# Altium PCB 存储物柜V1.1.PcbDoc (part 1 of 2)
Units mm, origin at the board's own origin, x right, y up, seen from the top; angles counter-clockwise.
Board outline 525.53 x 267.33 mm, 2 copper layers (Top Layer, Bottom Layer); 194 components, 171 nets, 781 pads, 690 vias.
Unrouted connection lines stored in the file: 2.
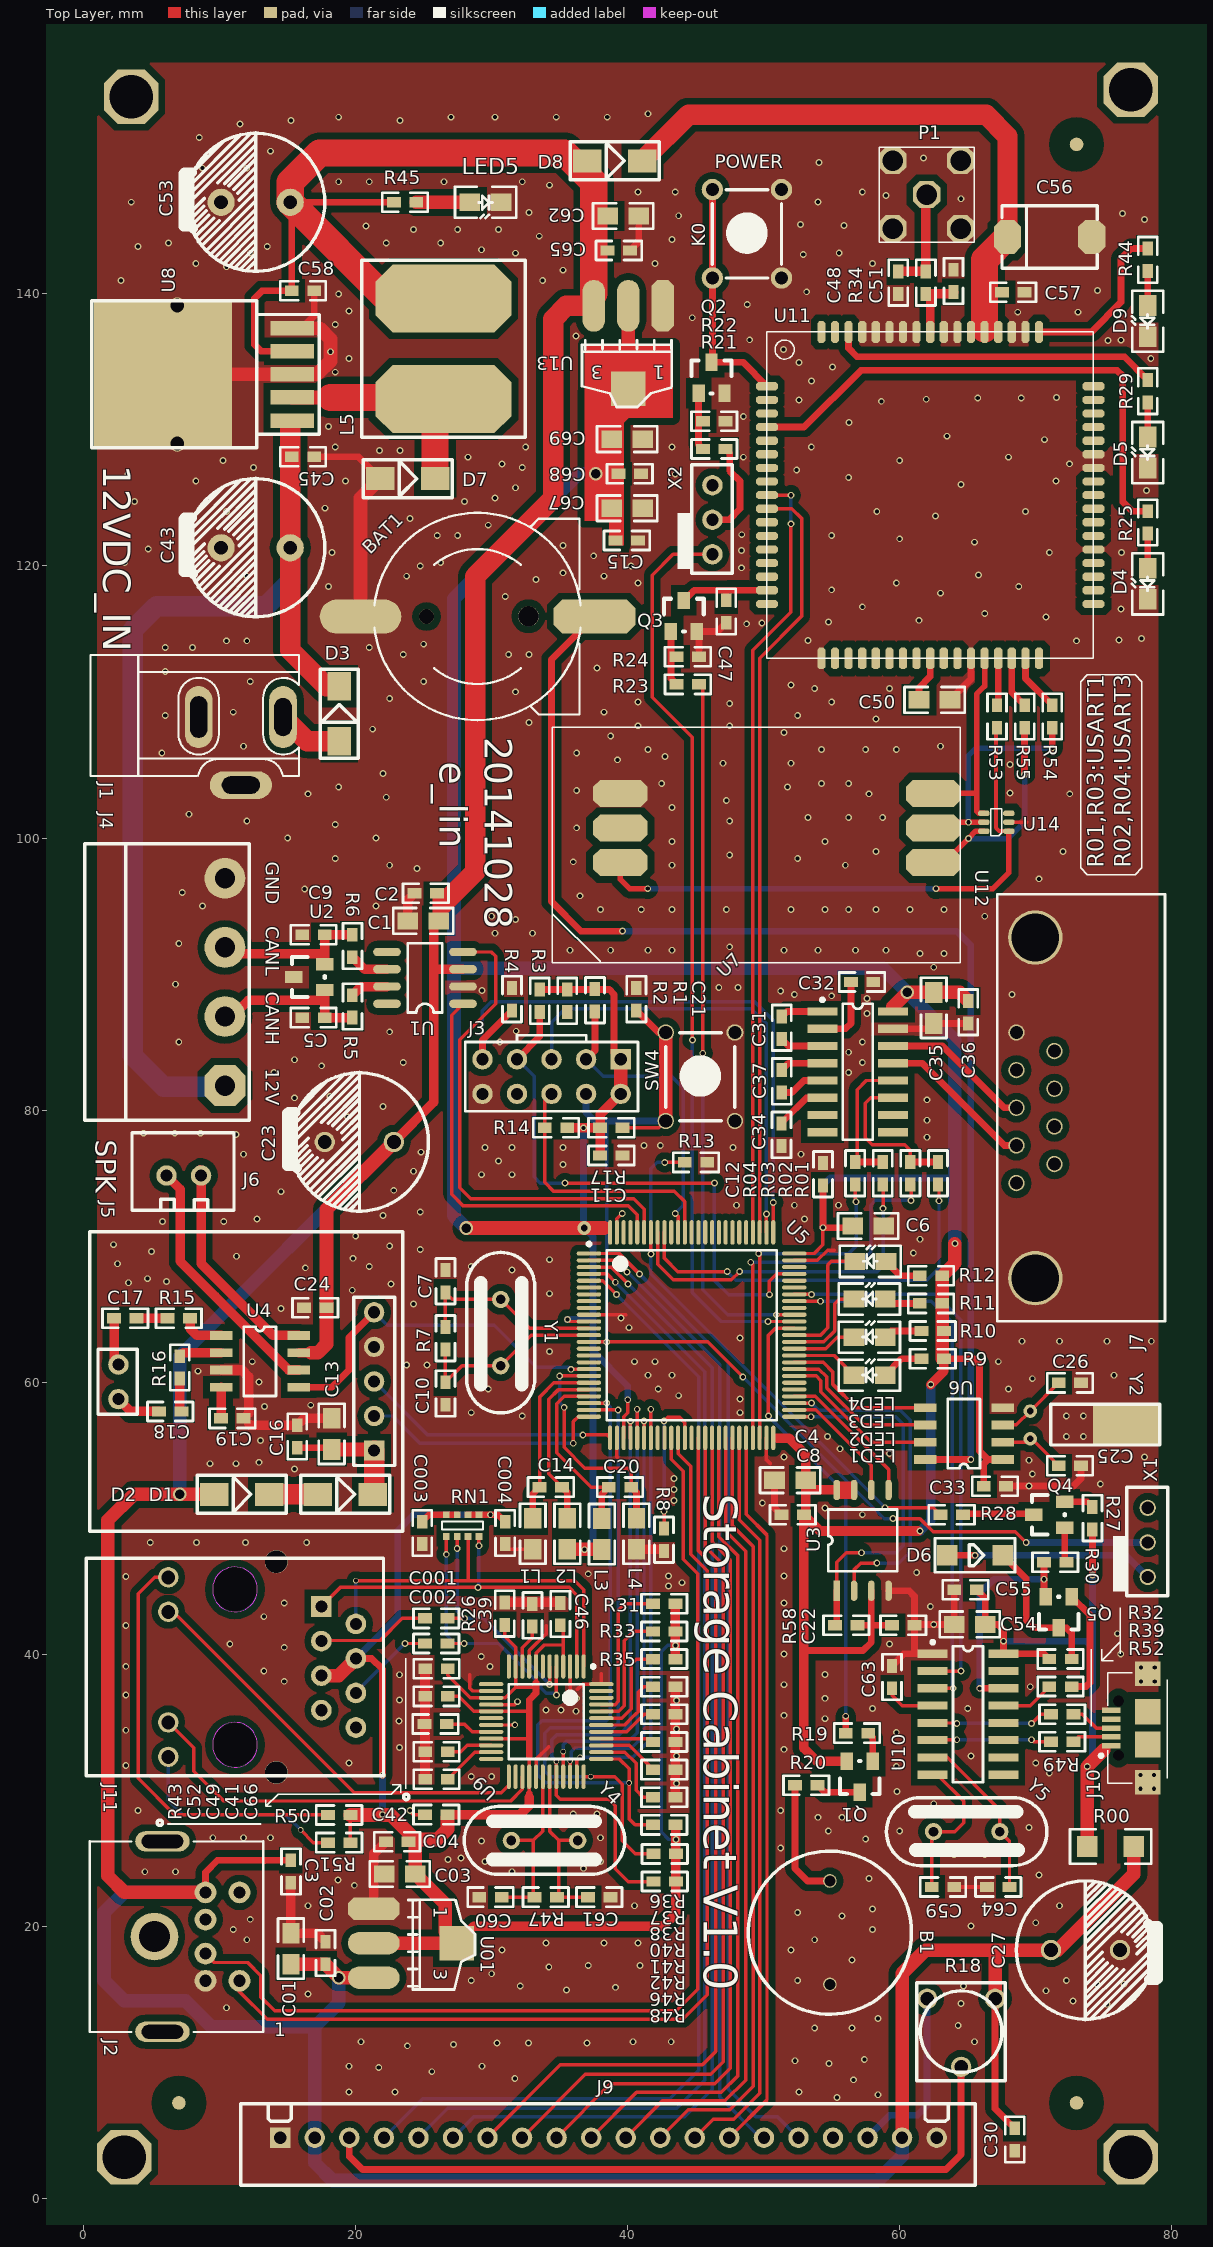
[diagram p0: Top Layer view]
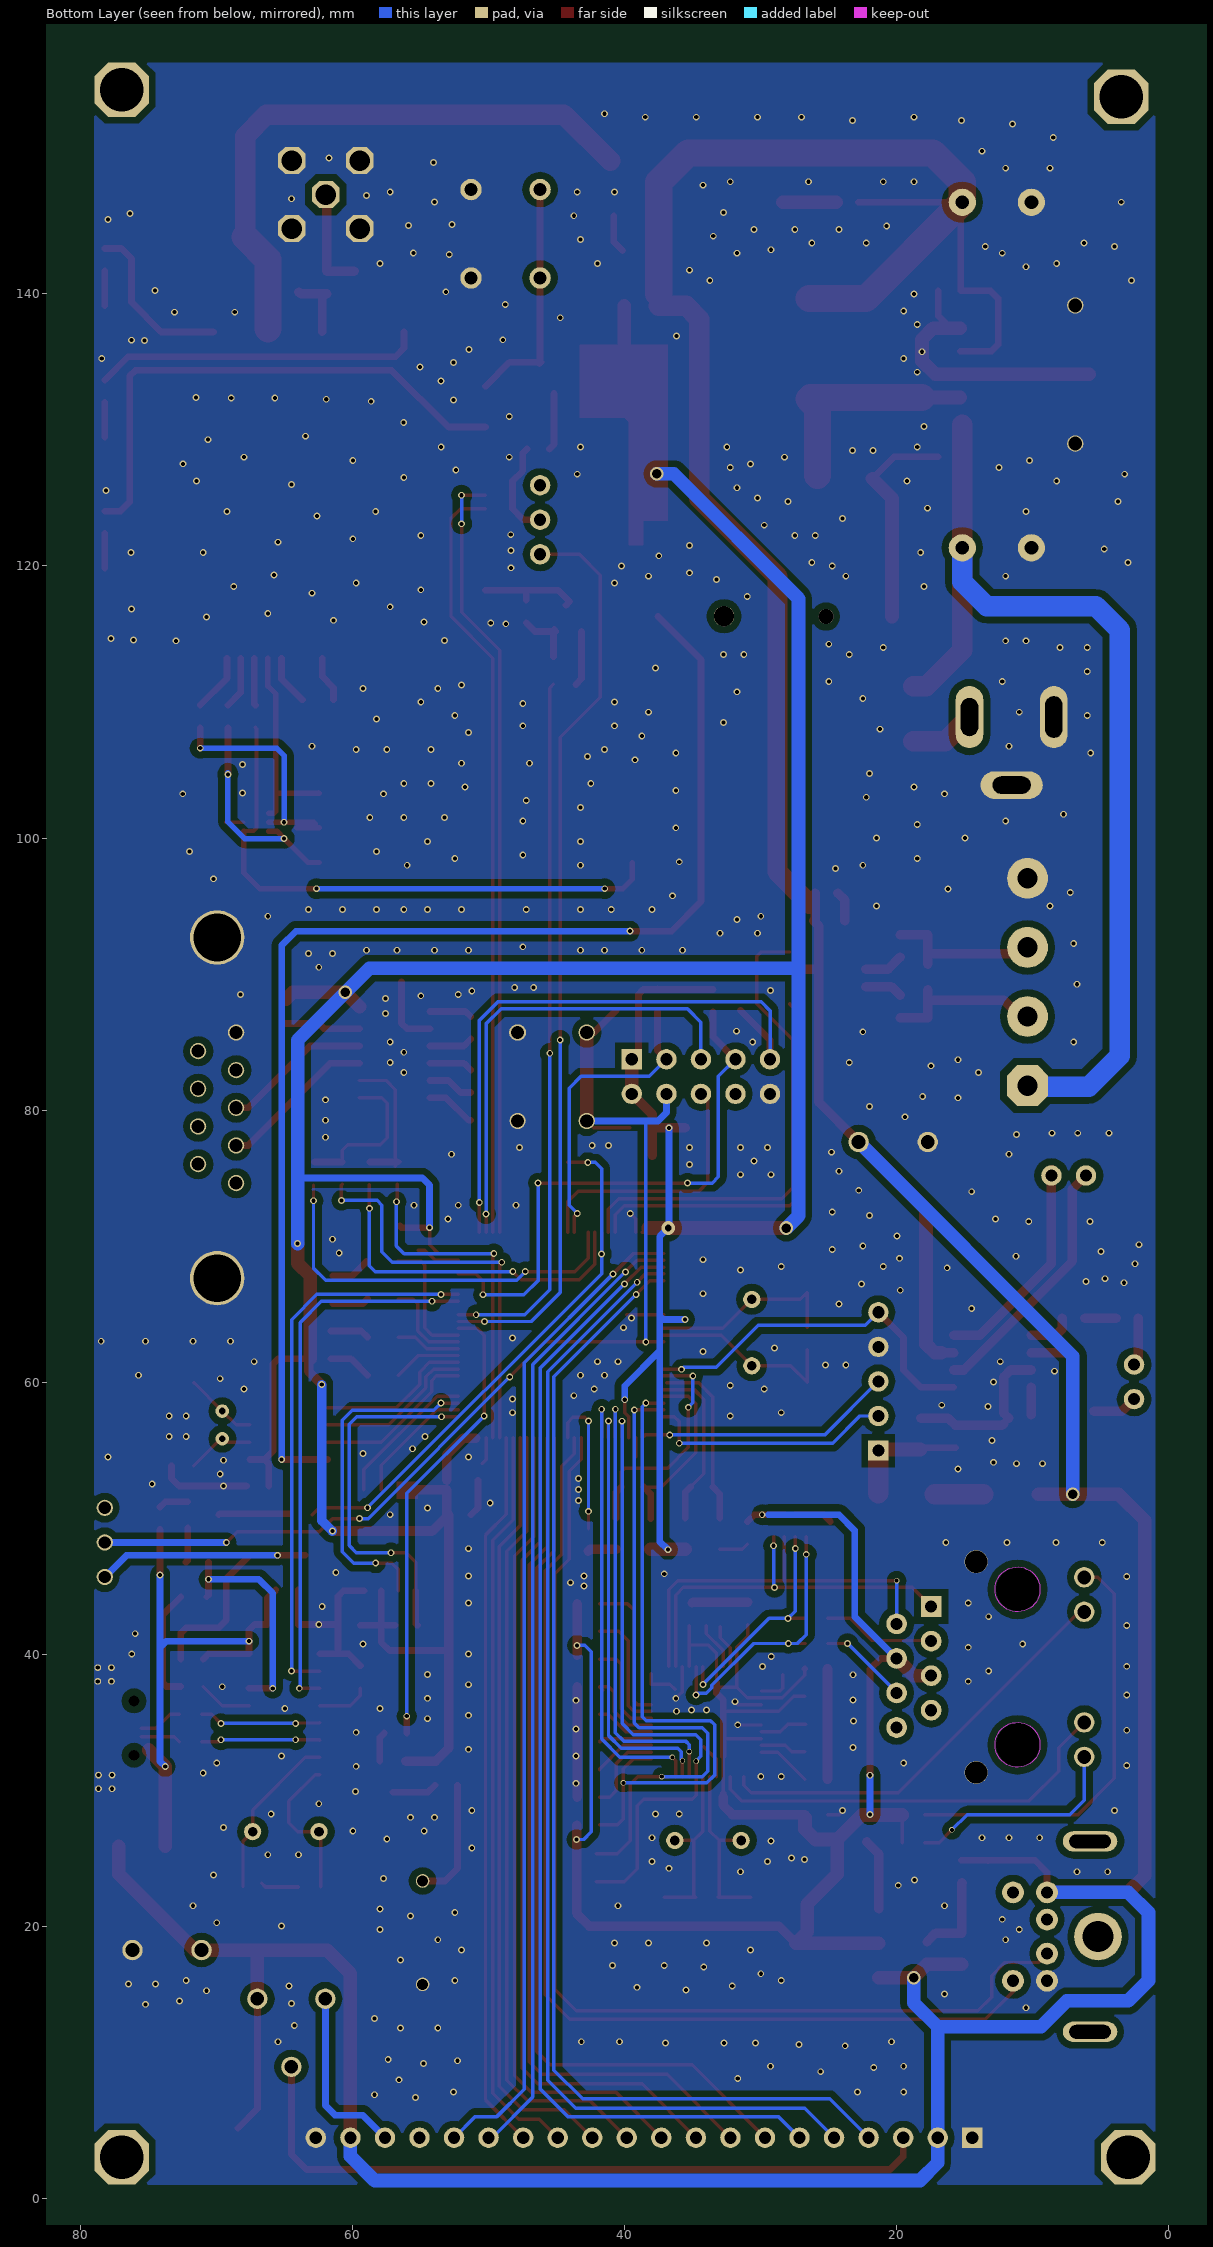
[diagram p1: Bottom Layer view, seen from below]

## Layer stack, top to bottom
Top Layer: signal copper 0.0356
Dielectric: dielectric 0.32, FR-4, Dk 4.8
Bottom Layer: signal copper 0.0356

## Board outline
-30.994,-50.111 487.166,-50.111 487.674,-49.603 494.532,-42.745 494.532,83.874 494.532,195.38 472.688,217.224 30.855,217.224 -10.293,217.224 -29.47,198.047

## Design rules (kind name [scope] priority, off if disabled: settings)
Clearance [All] p1: gap=0.5
PlaneClearance [All] p1: clearance=0.5
PlaneConnect [All] p1: planeconnectstyle=Direct reliefexpansion=0.508 reliefentries=4 reliefconductorwidth=0.254 reliefairgap=0.254
PolygonConnect [All] p1: connectstyle=Direct reliefconductorwidth=0.254 reliefentries=4 polygonreliefangle="90 Angle"
RoutingVias [All] p1: holewidth=0.711 width=1.27 viastyle="Through Hole" minholewidth=0.3 minwidth=1.27 maxholewidth=0.711 maxwidth=1.27
SilkscreenOverComponentPads [All] p1: minsilkscreentomaskgap=0.254
SolderMaskExpansion [All] p1: expansion=0.102
Width [All] p1: maxlimit=6 minlimit=0.254 preferedwidth=0.254 minimp=50.000000 maximp=50.000000 favimp=50.000000
25 further rules are at their usual default settings.

## Components (designator, comment, footprint, x,y, rotation, side; value= is the part's Value field where it differs from the comment)
B1 "BEEP" BEEP-12 54.864,23.32 r270 top locked
BAT1 "BATT" BATM 28.956,116.284 r90 top locked
C1 "10uF/16V" 0805 23.826,93.907 r0 top locked
C01 "10uF" 0805 15.24,17.199 r90 top locked
C001 "6.8nF" 0603 25.1,42.624 r0 top
C2 "0.1uF" 0603 24.334,95.939 r0 top locked
C02 "0.1uF" 0603 17.78,17.199 r90 top locked
C002 "6.8nF" 0603 25.1,40.78 r0 top
C3 "0.1uF" 0603 15.24,24.844 r270 top locked
C03 "10uF" 0805 24.384,23.828 r180 top locked
C003 "10nF" 0603 24.892,49.736 r270 top
C4 "10uF/25V" 0805 50.8,52.784 r0 top locked
C04 "0.1uF" 0603 23.876,26.2 r180 top locked
C004 "10nF" 0603 30.988,49.736 r270 top
C5 "470pF" 0603 17.73,86.795 r180 top locked
C6 "10uF/25V" 0805 58.826,71.478 r180 top locked
C7 "18p" 0603 26.601,66.586 r90 top locked
C8 "0.1uF" 0603 51.308,50.244 r0 top locked
C9 "470pF" 0603 17.73,92.891 r180 top locked
C10 "18p" 0603 26.601,59.982 r270 top locked
C11 "0.1uF" 0603 39.624,76.66 r180 top locked
C12 "0.1uF" 0603 54.356,76.101 r270 top locked
C13 "10uF/16V" 0805 18.238,57.331 r270 top locked
C14 "0.1uF" 0603 33.528,52.276 r0 top locked
C15 "0.1uF" 0603 39.116,121.872 r0 top locked
C16 "0.1uF" 0603 15.698,56.823 r270 top locked
C17 "1uF" 0603 2.236,64.697 r0 top locked
C18 "1uF" 0603 5.538,57.839 r0 top locked
C19 "1uF" 0603 10.11,57.331 r0 top locked
C20 "0.1uF" 0603 38.608,52.276 r0 top locked
C21 "0.1uF" 0603 40.64,87.328 r90 top locked
C22 "0.1uF" 0603 59.436,42.116 r0 top locked
C23 "470uF" RB5.0-8#1 22.81,77.651 r0 top locked
C24 "0.1uF" 0603 16.206,65.459 r0 top locked
C25 "20pF" 0603 73.34,53.844 r180 top locked
C26 "20pF" 0603 73.34,59.94 r180 top locked
C27 "470uF" RB5.0-8#1 71.12,18.24 r180 top locked
C30 "0.1uF" 0603 68.456,3.488 r90 top
C31 "0.1uF" 0603 51.329,86.871 r270 top locked
C32 "0.1uF" 0603 56.409,89.411 r0 top locked
C33 "0.1uF" 0603 67.824,52.348 r180 top locked
C34 "0.1uF" 0603 51.308,79 r270 top locked
C35 "10uF" 0805 62.505,86.363 r90 top locked
C36 "0.1uF" 0603 65.045,86.363 r90 top locked
C37 "0.1uF" 0603 51.329,81.283 r90 top locked
C39 "0.1uF" 0603 30.963,42.149 r90 top locked
C41 "0.1uF" 0603 26.772,36.891 r180 top locked
C42 "0.1uF" 0603 26.75,28.2 r180 top locked
C43 "470uF" RB5.0-8#2 15.19,121.339 r0 top locked
C45 "0.1uF" 0603 16.954,128.039 r180 top locked
C46 "0.1uF" 0603 35.052,42.116 r90 top locked
C47 "0.1uF" 0603 47.244,115.824 r90 top
C48 "NC" 0603 59.894,141.659 r270 top locked
C49 "4.7uF" 0603 25.05,34.859 r0 top locked
C50 "10uF" 0805 61.418,110.163 r0 top locked
C51 "NC" 0603 63.958,140.135 r90 top locked
C52 "10nF" 0603 26.772,32.827 r180 top locked
C53 "470uF" RB5.0-8#2 15.19,146.739 r0 top locked
C54 "10uF" 0805 64.008,42.184 r0 top locked
C55 "0.1uF" 0603 64.008,44.724 r0 top locked
C56 "1000uF/6.3V" 7343 68.022,144.199 r0 top locked
C57 "0.1uF" 0603 67.514,140.135 r0 top locked
C58 "0.1uF" 0603 16.954,140.231 r180 top locked
C59 "18pF" 0603 64.008,22.88 r180 top locked
C60 "18p" 0603 29.084,22.133 r0 top locked
C61 "18p" 0603 38.736,22.133 r180 top locked
C62 "10uF" 0805 38.526,145.731 r0 top locked
C63 "0.1uF" 0603 59.436,39.136 r270 top locked
C64 "18pF" 0603 68.072,22.88 r180 top locked
C65 "0.1uF" 0603 38.526,143.191 r0 top locked
C66 "0.1uF" 0603 26.772,38.923 r180 top
C67 "10uF" 0805 38.822,124.247 r0 top locked
C68 "0.1uF" 0603 39.33,126.787 r0 top locked
C69 "10uF" 0805 38.822,129.327 r0 top locked
D1 "M7" SMB 17.222,51.743 r0 top locked
D2 "M7" SMB 9.602,51.743 r0 top locked
D3 "B340" SMB 18.796,107.115 r90 top locked
D4 "LED-R" LED-0805 78.232,119.84 r270 top
D5 "LED-R" LED-0805 78.232,129.492 r270 top
D6 "IN4148" SOD-23 62.484,47.264 r0 top
D7 "B340" SMB 21.794,126.419 r0 top locked
D8 "B340" SMB 37.034,149.787 r0 top locked
D9 "LED-R" LED-0805 78.232,139.144 r270 top
J1 "POWER" DC10B 4.014,104.575 r0 top locked
J2 "PS2" PS2-6PIN 0.458,19.231 r90 top locked
J3 "JTAG_10" JTAG_10 39.484,83.728 r180 top locked
J4 "SIP4A-2.50(带槽)" 5.08_4P 12.192,79.248 r90 top
J5 "2.54-7" SYN6288 0.458,71.047 r270 top locked
J6 "SIP2A-2.50（带槽）" 2.54 3.556,72.644 r0 top
J7 "DB9" DB9/M 68.58,74.628 r90 top locked
J9 "12864" XH2.54-20P 11.56,0.948 r0 top
J10 "microb usb" USB_micro 78.232,34.564 r90 top locked
J11 "HR911105A" HR911105A 11.126,39.043 r90 top locked
K0 "KEY_M" KEY_M#1 46.228,141.176 r90 top
L1 "100uH" 0805 33.02,47.704 r90 top locked
L2 "100uH" 0805 35.56,47.704 r90 top locked
L3 "100uH" 0805 38.1,49.97 r270 top locked
L4 "100uH" 0805 40.64,47.704 r90 top locked
L5 "33uH" INDUCTOR-1212 32.462,129.467 r90 top locked
LED1 "" LED-0805 58.928,60.5 r180 top locked
LED2 "" LED-0805 58.928,63.3 r180 top locked
LED3 "" LED-0805 58.928,66.1 r180 top locked
LED4 "" LED-0805 58.985,68.872 r180 top locked
LED5 "LED-R" LED-0805 28.398,146.739 r0 top locked
P1 "COAX-M" ST-TH1 65.482,150.803 r180 top locked
Q1 "3906" SOT-23 58.015,32.131 r180 top locked
Q2 "3904" SOT-23 45.212,132.692 r0 top
Q3 "3904" SOT-23 43.18,115.184 r0 top
Q4 "3906" SOT-23 72.136,49.296 r90 top locked
Q5 "3904" SOT-23 72.644,44.216 r180 top locked
R00 "NC" 1206 77.216,25.86 r180 top
R1 "10K" 0603 37.592,88.903 r270 top locked
R01 "0" 0603 62.816,76.183 r270 top locked
R2 "10K" 0603 35.56,88.852 r270 top locked
R02 "0" 0603 60.784,76.183 r270 top locked
R3 "10K" 0603 33.528,88.852 r270 top locked
R03 "0" 0603 58.752,76.183 r270 top locked
R4 "10K" 0603 31.496,87.328 r90 top locked
R04 "0" 0603 56.72,76.183 r270 top locked
R5 "10" 0603 19.762,86.795 r90 top locked
R6 "10" 0603 19.762,92.891 r270 top locked
R7 "1M" 0603 26.601,64.046 r270 top locked
R8 "10K" 0603 42.672,49.228 r270 top locked
R9 "1K" 0603 61.604,61.718 r0 top locked
R10 "1K" 0603 61.604,63.75 r0 top locked
R11 "1K" 0603 63.128,65.782 r180 top locked
R12 "1K" 0603 63.128,67.814 r180 top locked
R13 "10K" 0603 44.196,76.152 r0 top locked
R14 "10K" 0603 35.56,78.692 r180 top locked
R15 "1K" 0603 7.824,64.697 r180 top locked
R16 "1K" 0603 7.062,61.903 r270 top locked
R17 "10K" 0603 39.624,78.692 r180 top locked
R18 "10K" RM065-V1 64.516,9.652 r90 top
R19 "1K" 0603 57.683,34.191 r180 top locked
R20 "22" 0603 52.299,30.356 r0 top locked
R21 "1K" 0603 47.194,128.603 r180 top locked
R22 "10K" 0603 47.194,130.635 r180 top locked
R23 "1K" 0603 45.25,111.295 r180 top locked
R24 "10K" 0603 45.25,113.327 r180 top locked
R25 "1K" 0603 78.232,122.38 r90 top
R26 "12.4K" 0603 32.995,43.673 r270 top locked
R27 "22" 0603 74.168,50.82 r270 top locked
R28 "1K" 0603 62.992,50.244 r0 top locked
R29 "1K" 0603 78.232,132.032 r90 top
R30 "1K" 0603 70.612,46.756 r0 top locked
R31 "10K" 0603 43.511,43.698 r180 top locked
R32 "2K" 0603 72.644,39.644 r180 top locked
R33 "10K" 0603 43.511,41.666 r180 top locked
R34 "0R" 0603 61.926,141.659 r270 top locked
R35 "10K" 0603 43.511,39.634 r180 top locked
R36 "10K" 0603 43.511,37.602 r180 top locked
R37 "10K" 0603 43.511,35.57 r180 top locked
R38 "10K" 0603 43.511,33.538 r180 top locked
R39 "1K" 0603 72.644,37.612 r180 top locked
R40 "10K" 0603 43.511,31.506 r180 top locked
R41 "10K" 0603 43.511,29.474 r180 top locked
R42 "10K" 0603 43.511,27.442 r180 top locked
R43 "10K" 0603 26.772,30.795 r180 top locked
R44 "1K" 0603 78.232,141.684 r90 top
R45 "1K" 0603 22.81,146.739 r0 top locked
R46 "10K" 0603 43.55,25.308 r180 top locked
R47 "1M" 0603 33.148,22.133 r0 top locked
R48 "10K" 0603 43.55,23.276 r180 top locked
R49 "0" 0603 71.12,33.548 r0 top locked
R50 "270" 0603 19.61,28.172 r180 top locked
R51 "270" 0603 19.61,26.14 r180 top locked
R52 "0" 0603 71.12,35.58 r0 top locked
R53 "22" 0603 67.154,108.111 r90 top locked
R54 "22" 0603 71.218,108.111 r90 top locked
R55 "22" 0603 69.186,108.111 r90 top locked
R58 "10K" 0603 56.896,42.116 r180 top locked
RN1 "51R" 0603-4 29.464,50.244 r180 top
SW4 "KEY_M" KEY_M#2 42.8,79.2 r90 top locked
U1 "TAJ1050" SO-8 27.89,87.811 r180 top locked
U01 "LM1117" AMS1117 21.336,21.288 r270 top locked
U2 "TVS_CAN" SOT-23 17.73,88.827 r90 top locked
U3 "SST25VF016B" SOIC-8 55.372,44.656 r90 top locked
U4 "SNAP01" sop-8 10.11,63.427 r0 top locked
U5 "STM32F103VET6" LQFP100_N 44.704,63.452 r0 top locked
U6 "DS1302" SOP-8 67.564,54.308 r180 top locked
U7 "MAX3232" SOP16#1 54.317,87.252 r0 top
U8 "LM2596S_5.0" TO-263-5 15.338,130.691 r0 top locked
U9 "W5500" LQFP48_N 34.011,35.037 r270 top locked
U10 "CH340" SOP16#2 65.024,35.58 r270 top
U11 "SIM900" SIM-900 50.242,113.211 r0 top locked
U12 "SIM" sim-6p 64.466,108.131 r180 top locked
U13 "LM1117" AMS1117 42.59,139.127 r180 top locked
U14 "SMF05" SC70-6L 68.022,100.511 r180 top locked
X1 "2.54-TX" 2.54-TX#1 76.708,52.276 r270 top
X2 "2.54-TX" 2.54-TX#2 44.704,127.46 r270 top
Y1 "8MHz" XTAL_US 30.665,66.078 r270 top locked
Y2 "32.768KHz" cs-308 71.12,58.372 r0 top locked
Y4 "25MHz" XTAL_US 31.446,26.299 r0 top locked
Y5 "12M" XTAL_US 62.484,26.944 r0 top locked

## Footprints (in the part's own frame and the unit in brackets; to place one, negate y for a bottom-side part, rotate by r counter-clockwise, add the part's x,y. Pads: shape width x height; smd on the part's side, far side on the other; paste and mask are expansions set on the pad)
2.54 [mm]
  round 1.5 hole 0.9: 1(5.08,2.54) 2(2.54,2.54)
  silkscreen extent 0,0 7.5,5.7
2.54-TX#1 [mm]
  round 1.2 hole 0.9: 1(6.604,1.524) 2(4.064,1.524) 3(1.524,1.524)
  silkscreen extent 0,0 8,3
2.54-TX#2 [mm]
  round 1.5 hole 0.9: 1(6.604,1.524) 2(4.064,1.524) 3(1.524,1.524)
  silkscreen extent 0,0 8,3
5.08_4P [mm]
  oct 3x3 hole 1.5: 1(2.55,1.8)
  round 3 hole 1.5: 2(7.63,1.8) 3(12.71,1.8) 4(17.79,1.8)
  silkscreen extent 0,0 20.32,12.11
0603 [mil]
  rect 40x30 smd: 1(0,0) 2(65,0)
  silkscreen extent -33,-28 98,28
0603-4 [mm]
  rect 0.5x0.5 smd: 1(0.4,0) 2(0.4,1.6) 3(1.2,0) 4(1.2,1.6) 5(2,0) 6(2,1.6) 7(2.8,0) 8(2.8,1.6)
  silkscreen extent 0.1,0.5 3.1,1.1
0805 [mil]
  rect 60x50 smd: 1(0,0) 2(90,0)
  silkscreen extent -42,-37 132,37
1206 [mil]
  rect 60x60 smd: 1(0,0) 2(135,0)
  silkscreen extent -50,-50 185,50
7343 [mm]
  oct 2x2.5 smd: 1(-0.1,0) 2(6.1,0)
  silkscreen extent -0.5,-2.3 6.5,2.3
AMS1117 [mil]
  oct 65x150 smd: 1(0.03,-0.06)
  oval 65x150 smd: 2(100.03,-0.06) 3(200.03,-0.06)
  rect 100x100 smd: 4(100.03,239.94)
  silkscreen extent -26,100 234,293
BATM [mm]
  round 1.1 hole 1.1 unplated: 0(0,3.748)
  round 1.5 hole 1.5 unplated: 0(0.025,-3.752)
  oct 2.5x6 smd: 1(0,-8.602)
  oval 2.5x6 smd: 2(0,8.598)
  silkscreen extent -7.62,-7.58 7.62,7.57
BEEP-12 [mm]
  round 1 hole 0.8: 1(0,0) 2(7.6,0)
  silkscreen extent -2.2,-6 9.8,6
cs-308 [mm]
  round 1 hole 0.5: 1(-1.524,-0.508) 2(-1.524,-2.54)
  rect 5x3 smd: 3(5.588,-1.524)
  silkscreen extent 0,-3 8,0
DB9/M [mil]
  round 47.24 hole 38: 1(0,0) 2(109,0) 3(218,0) 4(327,0) 5(436,0) 6(55,-110) 7(164,-110) 8(273,-110) 9(382,-110)
  round 157.48 hole 138: 10(711,-55) 11(-275,-55)
  silkscreen extent -400,-430 836,55
DC10B [mil]
  oval 80x180 hole 50 slot 110 at 90 deg: 1(419.1,170)
  oval 80x180 hole 50 slot 120 at 90 deg: 2(175,170)
  oval 180x80 hole 50 slot 110 at 0 deg: 3(297.05,-26.85)
  silkscreen extent -138,0 465,350
HR911105A [mil]
  rect 60x60 hole 35: 1(175.2,-250)
  round 60 hole 35: 2(125.2,-350) 3(75.2,-250) 4(25.2,-350) 5(-24.8,-250) 6(-74.8,-350) 7(-124.8,-250) 8(-174.8,-350)
  round 59.06 hole 40.16: 9(259.84,192.91) 12(-259.84,192.91)
  round 59.05 hole 40.16: 10(160,192.91) 11(-160,192.91)
  round 66.93 hole 64.96: 13(305.12,-120) 14(-305.12,-120)
  Keep-Out Layer circle w2: c225.04,0 r64.96
  Keep-Out Layer circle w2: c-224.96,0 r64.96
  silkscreen extent -315,-430 315,430
INDUCTOR-1212 [mm]
  oct 5x10 smd: 1(2.8,6) 2(10.2,6)
  silkscreen extent 0,0 13,12
JTAG_10 [mm]
  rect 1.5x1.5 hole 0.9: 1(0,0)
  round 1.5 hole 0.9: 2(0,2.54) 3(2.54,0) 4(2.54,2.54) 5(5.08,0) 6(5.08,2.54) 7(7.62,0) 8(7.62,2.54) 9(10.16,0) 10(10.16,2.54)
  silkscreen extent -1.27,-1.78 11.43,3.81
KEY_M#1 [mil]
  round 62 hole 38: 1(0,0) 1(255.91,0) 2(0,-200) 2(255.91,-200)
  silkscreen extent 0,-200 255,0
KEY_M#2 [mil]
  round 47.24 hole 38: 1(0,0) 1(255.91,0) 2(0,-200)
  oval 47.24x49.21 hole 38: 2(255.91,-200)
  silkscreen extent 0,-200 255,0
LED-0805 [mil]
  rect 60x50 smd: 1(0,0) 2(90,0)
  silkscreen extent -43,-46 134,45
LQFP48_N [mm] "Thin QFP, 48-Leads, Body 7x7mm, Pitch 0.5mm, IPC Medium Density"
  oval 1.8x0.3 smd: 1(-4.05,2.75) 2(-4.05,2.25) 3(-4.05,1.75) 4(-4.05,1.25) 5(-4.05,0.75) 6(-4.05,0.25) 7(-4.05,-0.25) 8(-4.05,-0.75) 9(-4.05,-1.25) 10(-4.05,-1.75) 11(-4.05,-2.25) 12(-4.05,-2.75) 25(4.05,-2.75) 26(4.05,-2.25) 27(4.05,-1.75) 28(4.05,-1.25) 29(4.05,-0.75) 30(4.05,-0.25) 31(4.05,0.25) 32(4.05,0.75) 33(4.05,1.25) 34(4.05,1.75) 35(4.05,2.25) 36(4.05,2.75)
  oval 0.3x1.8 smd: 13(-2.75,-4.05) 14(-2.25,-4.05) 15(-1.75,-4.05) 16(-1.25,-4.05) 17(-0.75,-4.05) 18(-0.25,-4.05) 19(0.25,-4.05) 20(0.75,-4.05) 21(1.25,-4.05) 22(1.75,-4.05) 23(2.25,-4.05) 24(2.75,-4.05) 37(2.75,4.05) 38(2.25,4.05) 39(1.75,4.05) 40(1.25,4.05) 41(0.75,4.05) 42(0.25,4.05) 43(-0.25,4.05) 44(-0.75,4.05) 45(-1.25,4.05) 46(-1.75,4.05) 47(-2.25,4.05) 48(-2.75,4.05)
  silkscreen extent -4.17,-2.75 2.75,3.58, body extent -3.5,-3.5 3.5,3.5, height 1.6
LQFP100_N [mm] "Thin QFP, 100-Leads, Body 14x14mm, Pitch 0.5mm, IPC Medium Density"
  oval 1.8x0.3 smd: 1(-7.55,6) 2(-7.55,5.5) 3(-7.55,5) 4(-7.55,4.5) 5(-7.55,4) 6(-7.55,3.5) 7(-7.55,3) 8(-7.55,2.5) 9(-7.55,2) 10(-7.55,1.5) 11(-7.55,1) 12(-7.55,0.5) 13(-7.55,0) 14(-7.55,-0.5) 15(-7.55,-1) 16(-7.55,-1.5) 17(-7.55,-2) 18(-7.55,-2.5) 19(-7.55,-3) 20(-7.55,-3.5) 21(-7.55,-4) 22(-7.55,-4.5) 23(-7.55,-5) 24(-7.55,-5.5) 25(-7.55,-6) 51(7.55,-6) 52(7.55,-5.5) 53(7.55,-5) 54(7.55,-4.5) 55(7.55,-4) 56(7.55,-3.5) 57(7.55,-3) 58(7.55,-2.5) 59(7.55,-2) 60(7.55,-1.5) 61(7.55,-1) 62(7.55,-0.5) 63(7.55,0) 64(7.55,0.5) 65(7.55,1) 66(7.55,1.5) 67(7.55,2) 68(7.55,2.5) 69(7.55,3) 70(7.55,3.5) 71(7.55,4) 72(7.55,4.5) 73(7.55,5) 74(7.55,5.5) 75(7.55,6)
  oval 0.3x1.8 smd: 26(-6,-7.55) 27(-5.5,-7.55) 28(-5,-7.55) 29(-4.5,-7.55) 30(-4,-7.55) 31(-3.5,-7.55) 32(-3,-7.55) 33(-2.5,-7.55) 34(-2,-7.55) 35(-1.5,-7.55) 36(-1,-7.55) 37(-0.5,-7.55) 38(0,-7.55) 39(0.5,-7.55) 40(1,-7.55) 41(1.5,-7.55) 42(2,-7.55) 43(2.5,-7.55) 44(3,-7.55) 45(3.5,-7.55) 46(4,-7.55) 47(4.5,-7.55) 48(5,-7.55) 49(5.5,-7.55) 50(6,-7.55) 76(6,7.55) 77(5.5,7.55) 78(5,7.55) 79(4.5,7.55) 80(4,7.55) 81(3.5,7.55) 82(3,7.55) 83(2.5,7.55) 84(2,7.55) 85(1.5,7.55) 86(1,7.55) 87(0.5,7.55) 88(0,7.55) 89(-0.5,7.55) 90(-1,7.55) 91(-1.5,7.55) 92(-2,7.55) 93(-2.5,7.55) 94(-3,7.55) 95(-3.5,7.55) 96(-4,7.55) 97(-4.5,7.55) 98(-5,7.55) 99(-5.5,7.55) 100(-6,7.55)
  silkscreen extent -7.67,-6.25 6.25,6.82, body extent -7,-7 7,7, height 1.6
PS2-6PIN [mm]
  round 1.6 hole 0.9: 1(-1.25,-8.5) 2(1.25,-8.5) 3(-3.25,-8.5) 4(3.25,-8.5) 5(-3.25,-11) 6(3.25,-11)
  oval 1.5x4 hole 1 slot 3.048 at 90 deg: 7(-7,-5.334) 9(7,-5.334)
  round 3.5 hole 2.3: S(0,-4.75)
  silkscreen extent -7,-12.75 7,0
RB5.0-8#1 [mm]
  round 1.5 hole 1.016: 1(0,0) 2(-5.08,0)
  silkscreen extent -7.84,-5.08 2.54,5.11
RB5.0-8#2 [mm]
  round 2 hole 1.016: 1(0,0) 2(-5.08,0)
  silkscreen extent -7.84,-5.08 2.54,5.11
RM065-V1 [mm]
  round 1.5 hole 1: 1(5,-2.5) 2(0,0) 3(5,2.5)
  silkscreen extent -1.02,-3.25 6.2,3.25
SC70-6L [mm]
  oct 0.85x0.4 smd: 1(0,0) 2(0,-0.65) 3(0,-1.3) 4(1.829,-1.3) 5(1.829,-0.65) 6(1.829,0)
  silkscreen extent 0.51,-1.64 1.32,0.36
sim-6p [mm]
  oct 4x2 smd: 1(25,9.93) 2(25,7.39) 3(25,4.85) 4(2,9.93) 5(2,7.39) 6(2,4.85)
  silkscreen extent 0,0 30,17.3
SIM-900 [mm]
  oct 1.6x0.6 smd: 1(0,20) 2(0,19) 3(0,18) 4(0,17) 5(0,16) 6(0,15) 7(0,14) 8(0,13) 9(0,12) 10(0,11) 11(0,10) 12(0,9) 13(0,8) 14(0,7) 15(0,6) 16(0,5) 17(0,4) 35(24,4) 36(24,5) 37(24,6) 38(24,7) 39(24,8) 40(24,9) 41(24,10) 42(24,11) 43(24,12) 44(24,13) 45(24,14) 46(24,15) 47(24,16) 48(24,17) 49(24,18) 50(24,19) 51(24,20)
  oct 0.6x1.6 smd: 18(4,0) 19(5,0) 20(6,0) 21(7,0) 22(8,0) 23(9,0) 24(10,0) 25(11,0) 26(12,0) 27(13,0) 28(14,0) 29(15,0) 30(16,0) 31(17,0) 32(18,0) 33(19,0) 34(20,0) 52(20,24) 53(19,24) 54(18,24) 55(17,24) 56(16,24) 57(15,24) 58(14,24) 59(13,24) 60(12,24) 61(11,24) 62(10,24) 63(9,24) 64(8,24) 65(7,24) 66(6,24) 67(5,24) 68(4,24)
  silkscreen extent 0,0 24,24
SMB [mm]
  rect 2.1x1.7 smd: 1(0,0) 2(4.05,0)
  silkscreen extent -1.25,-1.4 5.3,1.4
SO-8 [mil]
  oval 80x24 smd: 1(0,0) 2(0,-50) 3(0,-100) 4(0,-150) 5(220,-150) 6(220,-100) 7(220,-50) 8(220,0)
  silkscreen extent 60,-175 160,25
SOD-23 [mm]
  rect 1.5x1.5 smd: 1(1.016,0) 2(5.1,0)
  silkscreen extent 0.12,-1.25 6,1.25
SOIC-8 [mm]
  rect 1.5x0.48 smd: 1(0,0)
  oval 1.5x0.48 smd: 2(0,-1.27) 3(0,-2.54) 4(0,-3.81) 5(7.41,-3.81) 6(7.41,-2.54) 7(7.41,-1.27) 8(7.41,0)
  silkscreen extent 1.44,-4.44 5.98,0.64
SOP16#1 [mm]
  rect 2.2x0.6 smd: 1(0,0) 2(0,-1.27) 3(0,-2.54) 4(0,-3.81) 5(0,-5.08) 6(0,-6.35) 7(0,-7.62) 8(0,-8.89) 9(5.2,-8.89) 10(5.2,-7.62) 11(5.2,-6.35) 12(5.2,-5.08) 13(5.2,-3.81) 14(5.2,-2.54) 15(5.2,-1.27) 16(5.2,0)
  silkscreen extent -0.12,-9.44 3.7,0.97
SOP16#2 [mm]
  rect 0.6x2.2 smd: 1(-4.445,-2.6) 2(-3.175,-2.6) 3(-1.905,-2.6) 4(-0.635,-2.6) 5(0.635,-2.6) 6(1.905,-2.6) 7(3.175,-2.6) 8(4.445,-2.6) 9(4.445,2.6) 10(3.175,2.6) 11(1.905,2.6) 12(0.635,2.6) 13(-0.635,2.6) 14(-1.905,2.6) 15(-3.175,2.6) 16(-4.445,2.6)
  silkscreen extent -5.42,-2.72 5,1.1
sop-8 [mil]
  rect 65x25 smd: 1(0,0) 2(0,-50) 3(0,-100) 4(0,-150) 5(224.41,-150) 6(224.41,-100) 7(224.41,-50) 8(224.41,0)
  silkscreen extent 65,-175 159,25
SOP-8 [mil]
  rect 65x25 smd: 1(0,0) 2(0,-50) 3(0,-100) 4(0,-150) 5(224.41,-150) 6(224.41,-100) 7(224.41,-50) 8(224.41,0)
  silkscreen extent 65,-175 159,25
SOT-23 [mil]
  rect 36x50 smd: 1(0,0) 2(75,0) 3(37.5,90)
  silkscreen extent -20,0 95,95
ST-TH1 [mm]
  oct 2x2 hole 1.5: 1(3.5,3.5) 2(1,6) 3(6,6) 4(6,1) 5(1,1)
  silkscreen extent 0,0 7,7
SYN6288 [mm]
  rect 1.5x1.5 hole 0.9: 1(16.08,20.9)
  round 1.5 hole 0.9: 2(13.54,20.9) 3(11,20.9) 4(8.46,20.9) 5(5.92,20.9) 6(9.76,2.1) 7(12.3,2.1)
  silkscreen extent 0,0 22,23
TO-263-5 [mm]
  rect 3.176x1.07 smd: 1(0,0) 2(0,1.7) 3(0,3.4) 4(0,5.1) 5(0,6.8)
  round 1.2 hole 1.016: 6(-8.45,-1.695) 8(-8.45,8.465)
  rect 10.16x10.668 smd: 7(-9.5,3.404)
  silkscreen extent -14.73,-2 1.98,8.8
USB_micro [mm]
  rect 1.8x1.9 smd: 0(-4,0) 0(4,0)
  round 0 hole 0.8: 0(-2,2.15) 0(2,2.15)
  rect 1.9x1.9 smd: 0(-1.2,0) 0(1.2,0)
  rect 0.4x1.35 smd: 1(-1.3,2.675) 2(-0.65,2.675) 3(0,2.675) 4(0.65,2.675) 5(1.3,2.675)
  silkscreen extent -4.06,-1.45 4.06,3.55
XH2.54-20P [mm]
  rect 1.5x1.5 hole 0.9: 1(2.896,3.5)
  round 1.5 hole 0.9: 2(5.436,3.5) 3(7.976,3.5) 4(10.516,3.5) 5(13.056,3.5) 6(15.596,3.5) 7(18.136,3.5) 8(20.676,3.5) 9(23.216,3.5) 10(25.756,3.5) 11(28.296,3.5) 12(30.836,3.5) 13(33.376,3.5) 14(35.916,3.5) 15(38.456,3.5) 16(40.996,3.5) 17(43.536,3.5) 18(46.076,3.5) 19(48.616,3.5) 20(51.156,3.5)
  silkscreen extent 0,0 54,6
XTAL_US [mil]
  round 50 hole 28: 1(0,0) 2(192.13,0)
  silkscreen extent -136,-98 328,98

## Part data
B1: library part SPEAKER
BAT1: library part BAT
C1 C2 C5 C7 C9 C10 C13 C15 C16 C17 C18 C19 C22 C24 C31 C32 C33 C34 C35 C36 C37: library part CAP, "陶瓷电容"
C01 C02 C3 C03 C003 C4 C04 C004 C6 C8 C11 C12 C14 C20 C21 C23 C27 C39 C41 C42 C43 C46 C50 C52 C53 C55 C56 C62 C63 C65 C66 C67 C68 C69: library part CAP
C001 C002 C25 C26 C30 C45 C47 C48 C51 C57 C58 C60 C61: library part C
C49 C54 C59 C64: library part CAP, "0.1uF"
D1 D2 D6 D7 D8: library part DIODE
D3: library part 1N5824(SS54), "肖特基二极管"
D4 D5 D9 LED5: library part LED-RED, "红色LED"
J1: library part POW
L1 L2 L3 L4 L5: library part INDUCTOR
LED1 LED2 LED3 LED4: library part LED
P1: "SMA-J-P-H-ST-TH1"
Q1 Q4: library part PNP1
Q2 Q3 Q5: library part NPN1
R00 R8 R9 R10 R11 R12 R13 R17 R19 R20 R26 R27 R28 R29 R30 R31 R32 R33 R35 R36 R37 R38 R39 R40 R41 R42 R43 R44 R46 R47 R48 R49 R50 R51 R52 R53 R54 R55 R58: library part RES1
R1 R01 R2 R02 R3 R03 R4 R04 R5 R6 R7 R14 R15 R16: library part RES-1%, "高精度电阻"
R18: library part POT2
R21 R22 R23 R24 R25 R34 R45: library part Res
RN1: library part RESPACK
U2: "NUP2105L"
U3: library part W25X16, "W25X16;SST25VF016;MX25L1605"
U5: "STM32 ARM-based 32-bit MCU with 64 Kbytes Flash, 100-pin LQFP, Industrial Temperature"
U6: "实时时钟"
U7: library part MAX232
U8: "3A开关电源芯片"
U9: "以太网"
U12: "手机SIM卡"
Y1 Y2 Y4: library part XTAL, "Crystal Oscillator"
Y5: library part CRYSTAL

## Free pads (board coordinates)
  round 1 smd mask+1: 0(7,7) 1(73,151) 2(73,7)
  round 0.5 hole 0.3: 0(77.7,30.1) 0(77.75,39) 1(78.7,30.1) 1(78.75,39) 2(78.7,31.1) 2(78.75,38) 3(77.7,31.1) 3(77.75,38)
  round 0 hole 3.2: 3(11.126,33.328) 4(11.126,44.758)
  oct 4x4 hole 3.2: ""(3,3) ""(3.5,154.5) ""(77,3) ""(77,155)

## Via types
v1: diameter 0.5, hole 0.3, Top Layer to Bottom Layer, tented both sides, 676 vias
v2: diameter 0.4, hole 0.3, Top Layer to Bottom Layer, tented both sides, 8 vias
v3: diameter 1, hole 0.7, Top Layer to Bottom Layer, tented both sides, 5 vias
v4: diameter 1, hole 0.5, Top Layer to Bottom Layer, tented both sides, 1 vias

## Nets (pads, with @x,y where several pads share a name; then routed paths per layer and width w, separated by ;. In a path a pad name is that pad's centre, name@x,y a point inside that pad or via, vN(x,y) a via of type N, cw(c..) or ccw(c..) an arc to the next point about the centre after c; other vN are vias at no path point)
BELL: R19.2 U5.64 | length 33.7
  Top Layer w0.254: v1(50.343,57.508) 50.343,63.427 50.868,63.952 U5.64@52.254,63.952
  Top Layer w0.5: R19.2@56.032,34.191 v1(56.032,35.436)
  Bottom Layer w0.254: v1(50.343,57.508) 56.032,51.819 v1(56.032,35.436)
BOOT0: R13.1 R28.1 U5.94 | length 40.3
  Top Layer w0.254: v1(41.704,69.424) U5.94@41.704,71.002 ; v1(42.723,76.152) R13.1@44.196,76.152 ; v1(58.923,50.757) 62.479,50.757 R28.1@62.992,50.244
  Bottom Layer w0.254: 42.418,76.152 42.164,76.152 41.704,75.692 v1(41.704,69.424) 41.704,67.976 v1(58.923,50.757)
BOOT1: R8.1 U5.37 | length 10.8
  Top Layer w0.254: R8.1@42.672,49.228 v1(42.672,50.498) ; v1(42.672,57.127) 42.951,57.407 43.815,57.407 44.204,57.018 U5.37@44.204,55.902
  Bottom Layer w0.254: v1(42.672,50.498) v1(42.672,57.127)
CAN_RXD: U1.4 U5.95 | length 36.6
  Top Layer w0.254: U1.4@27.89,91.621 29.979,91.621 30.3,91.3 30.3,87.808 27.661,85.169 27.661,74.272 28.448,73.485 40.437,73.485 41.204,72.718 U5.95@41.204,71.002
CAN_TXD: U1.1 U5.96 | length 29.9
  Top Layer w0.254: U1.1@27.89,87.811 27.051,86.972 27.051,73.815 27.889,72.977 40.03,72.977 40.704,72.303 U5.96@40.704,71.002
CH340D+: R52.1 U10.5 | length 9.4
  Top Layer w0.254: U10.5@62.424,34.945 v1(64.2,34.9) ; v1(69.7,34.9) 70.38,35.58 R52.1@71.12,35.58 R52.1@70.68,35.58
  Bottom Layer w0.254: v1(64.2,34.9) v1(69.7,34.9)
CH340D-: R49.1 U10.6 | length 9.4
  Top Layer w0.254: U10.6@62.424,33.675 62.449,33.7 v1(64.2,33.7) ; v1@69.852,33.548 R49.1@71.12,33.548 70.252,33.548
  Bottom Layer w0.254: v1(64.2,33.7) v1(69.7,33.7)
DS_IO: U5.58 U6.6 | length 11.8
  Top Layer w0.254: U5.58@52.254,60.952 54.062,60.952 54.635,60.379 54.635,59.566 57.353,56.848 U6.6@61.864,56.848
DS_RST: U5.59 U6.5 | length 11.5
  Top Layer w0.254: U5.59@52.254,61.452 54.375,61.452 55.093,60.734 55.093,59.82 56.794,58.118 U6.5@61.864,58.118
DS_SCLK: U5.57 U6.7 | length 12.1
  Top Layer w0.254: U5.57@52.254,60.452 53.851,60.452 54.204,60.099 54.204,59.286 57.912,55.578 U6.7@61.864,55.578
F_CS: R58.2 U3.1 U5.51 | length 28
  Top Layer w0.254: U5.51@52.254,57.452 v1(53.487,57.452) ; U3.1@55.372,45.393 U3.1@55.372,44.656 55.372,46.764 56.058,47.45 v1(57.2,47.45)
  Top Layer w0.5: R58.2@55.245,42.116 55.372,42.243 U3.1@55.372,44.656
  Bottom Layer w0.254: v1(53.487,57.452) 59.721,57.452 60.274,56.899 60.274,47.983 59.741,47.45 v1(57.2,47.45)
GND: B1.2 BAT1.2 C1.1 C01.2 C2.1 C02.2 C003.2 C03.2 C3.2 C4.1 C04.2 C004.2 C5.2 C6.1 C7.2 C8.1 C9.2 C10.2 C11.1 C12.1 C13.1 C15.2 C16.1 C19.2 C21.2 C22.2 C23.2 C24.1 C25.1 C26.1 C27.2 C30.1 C32.2 C33.1 C34.2 C35.1 C36.1 C39.2 C41.2 C42.2 C43.2 C45.1 C46.2 C47.1 C48.2 C49.1 C50.2 C51.2 C52.2 C53.2 C54.1 C55.1 C56.2 C57.2 C58.1 C59.1 C60.1 C61.1 C62.2 C63.1 C64.2 C65.2 C66.2 C67.2 C68.2 C69.2 D4.2 D5.2 D7.1 D9.2 J1.2 J1.3 J2.3 J3.10 J4.4 J5.4 J7.5 J7.10 J7.11 J9.1 J9.20 J10.0@78.232,30.564 J10.0@78.232,38.564 J10.5 J11.13 J11.14 K0.2 L1.1 L4.1 LED5.2 P1.2 P1.3 P1.4 P1.5 pad.0@77.7,30.1 pad.0@77.75,39 pad.1@78.7,30.1 pad.1@78.75,39 pad.2@78.7,31.1 pad.2@78.75,38 pad.3@77.7,31.1 pad.3@77.75,38 Q2.2 Q3.2 R4.2 R8.2 R13.2 R22.1 R24.1 R26.1 R36.1 R37.1 R38.1 R40.1 R41.1 R43.2 SW4.2 U01.1 U1.2 U2.3 U3.4 U4.3 U5.10 U5.27 U5.49 U5.74 U5.99 U6.4 U7.15 U8.3 U8.5 U8.6 U8.7 U8.8 U9.3 U9.9 U9.14 U9.16 U9.19 U9.29 U9.48 U10.1 U11.18 U11.29 U11.39 U11.45 U11.46 U11.53 U11.54 U11.58 U11.59 U11.61 U11.62 U11.63 U11.64 U11.65 U12.3 U13.1 U14.2 Y2.3 | length 162.8
  Top Layer w0.254: v1@24,28.446 24.246,28.2 C42.2@25.099,28.2 ; 28.4,38.5 28.4,37.5 28.613,37.287 U9.14@29.961,37.287 ; U9.19@29.961,34.787 31.687,34.787 v1(31.7,34.8) ; U9.16@29.961,36.287 31.687,36.287 v1(31.9,36.5) ; C004.2@30.988,48.085 31.369,47.704 L1.1@33.02,47.704 ; U9.9@32.761,39.087 32.761,40.261 34,41.5 34,42.1 ; U9.29@33.261,30.987 33.261,32.261 34.2,33.2 ; U9.3@35.761,39.087 35.761,37.239 36,37 ; 36.3,37.4 36.687,37.787 U9.48@38.061,37.787 38.061,38.561 ; U5.10@37.154,64.952 39.848,64.952 ; U5.27@39.204,55.902 39.204,54.504 39.225,54.483 ; U5.99@39.204,71.002 39.204,72.004 v1(39.6,72.4) ; U5.49@50.204,55.902 50.204,54.296 50.5,54 ; U5.74@52.254,68.952 53.952,68.952 54.703,69.703 55.2,69.703 ; U14.2@68.022,101.161 69.339,101.161
  Top Layer w0.265: C59.1@64.008,22.88 C64.2@66.421,22.88 C64.2@66.7,23.159
  Top Layer w0.5: U8.5@15.338,137.491 16.066,137.491 16.954,138.379 C58.1@16.954,140.231 ; C45.1@16.954,128.039 20.174,128.039 D7.1@21.794,126.419 ; C65.2@40.177,143.191 40.812,143.826 C62.2@40.812,145.731 ; Q3.2@45.085,115.184 Q3.2@45.25,115.184 ; Q3.2@45.184,115.327 45.25,115.261 Q3.2@45.25,115.184 ; R24.1@45.25,113.327 Q3.2@45.25,115.184 ; C47.1@47.244,115.824 46.604,115.184 Q3.2@45.25,115.184 ; C4.1@50.8,52.784 50.8,50.752 C8.1@51.308,50.244 ; U3.4@59.182,44.656 60.681,44.656 61.087,44.25 C22.2@61.087,42.116 61.087,40.076 ; C63.1@59.436,39.136 60.325,40.025 U10.1@62.424,40.025 ; U7.15@59.517,85.982 62.124,85.982 C35.1@62.505,86.363 C36.1@65.045,86.363 ; C22.2@61.155,42.184 C54.1@64.008,42.184 C55.1@64.008,44.724 ; C50.2@63.704,110.163 65.242,111.701 U11.29@65.242,113.211 ; C33.1@67.824,52.348 72.767,52.348 73.34,52.921 C25.1@73.34,53.844
  Top Layer w0.7: U4.3@10.11,60.887 11.634,60.887 12.142,60.379 12.142,57.712 C19.2@11.761,57.331 ; C19.2@12.142,56.95 12.269,56.823 C16.1@15.698,56.823 16.206,57.331 C13.1@18.238,57.331 ; C3.2@15.19,23.143 C3.2@15.233,23.1 ; C3.2@15.24,23.193 C01.2@15.24,19.485 17.145,19.485 C02.2@17.78,18.85 ; U01.1@21.334,21.287 21.334,25.309 C04.2@22.225,26.2 ; C1.1@23.826,93.907 23.826,95.431 C2.1@24.334,95.939 ; R43.2@25.099,30.795 C66.2@25.099,38.923 ; C39.2@30.963,43.8 35.019,43.8 C46.2@35.052,43.767 ; L4.1@40.64,47.704 42.545,47.704 R8.2@42.672,47.577 ; R41.1@43.511,29.474 R40.1@43.511,31.506 R38.1@43.511,33.538 R37.1@43.511,35.57 R36.1@43.511,37.602
  Top Layer w1: U8.7@5.842,134.091 U8.3@15.338,134.091 17.166,134.091 18.15,135.075 18.15,136.675 17.334,137.491 U8.5@15.338,137.491 ; BAT1.2@20.358,116.284 20.358,124.983 D7.1@21.794,126.419
  other v1: 55.4,7.4 58.4,7.6 19.5,7.8 22.9,7.8 52.6,7.8 56.6,8.7 31.7,8.8 25.6,9.3 21.7,9.6 19.5,9.7 29.3,9.7 54.8,9.9 52.3,10.1 57.4,10.2 23.8,11.2 27.2,11.3 30.4,11.4 32.7,11.4 37,11.4 20.4,11.5 40.4,11.5 43.2,11.5 65.5,11.5 53.75,12.5 56.5,12.5 64.3,12.7 58.4,13.2 10.5,14 75.25,14.25 64.5,14.3 72.75,14.5 16.5,15 70.75,15.25 35.5,15.3 39.1,15.5 32.1,15.6 64.7,15.6 74.5,15.75 76.5,15.75 28.5,16 52.5,16 72.25,16 30,16.5 34.2,17 37.1,17.1 40.9,17.1 56.5,17.5 30.75,18.25 52,18.25 34,18.75 38.25,18.75 40.75,18.75 12,19 53.75,19 11,19.75 58,19.75 65.25,20 70,20.25 12.25,20.5 55.75,20.75 52.5,21 58,21.25 16.5,21.5 40.5,21.5 71.75,21.5 19.9,23 18.7,23.4 57.75,23.5 70.25,23.75 4.5,24 6.75,24 31.5,24 36.75,24.25 29.5,24.75 38,24.75 26.8,24.9 27.75,25 64,25.25 66.25,25.25 51.25,25.75 29.25,26.25 57.5,26.4 9.5,26.5 11.75,26.5 13.75,26.5 38,26.5 54.75,27 60,27 69.5,27.25 54,28 55.75,28 36,28.25 37.75,28.25 66,28.25 4,28.5 24,28.5 51.25,28.5 62.5,29 59.8,29.9 43.6,30.5 28.5,31 30,31 71,31.25 59.75,31.75 3.1,31.8 19.5,32 70,32 43.6,32.5 65.25,32.5 51.5,33 23.216,33.124 59.75,34.25 3.1,34.4 43.6,34.5 23.19,35.08 54.5,35.25 51.5,35.5 36.2,35.8 34,35.9 35.1,35.9 58,36 65,36 43.6,36.6 23.216,36.63 36.25,36.75 54.5,36.75 3.1,37 69.6,37.6 51.5,37.75 14.75,38 23.216,38.484 54.5,38.5 13.25,38.75 3.1,39.1 29.87,39.093 29.235,39.83 51.5,40 76.25,40 14.75,40.5 10.75,40.75 59.25,40.75 76,41.5 3.1,42.1 62.5,42.184 13.25,42.75 62.25,43.5 14.75,43.75 51.5,43.75 43,45 44,45.25 3.1,45.7 43,45.75 51.5,45.75 37.1,45.9 61.25,46 51.5,47.75 4.9,48.2 8.3,48.2 11.9,48.2 16.4,48.2 57.25,50.25 54.5,50.75 49.9,51.1 43.4,51.3 43.4,52.1 69.5,52.348 74.75,52.5 43.4,52.9 69.75,53.25 15.5,53.6 9.3,54 11.2,54 12.9,54.1 69.5,54.25 51.5,54.5 78,54.5 59.25,54.75 55.6,55.1 13,55.7 54.7,56 72.25,56 73.5,56 32.25,57.5 72.25,57.5 73.5,57.5 28.5,57.75 48.25,57.75 13.3,58.2 16.7,58.3 48.25,58.75 43.75,59 29.75,59.5 42.25,59.5 68,59.5 32.25,59.75 12.9,60 69.75,60.25 41.5,60.5 43.25,60.5 75.75,60.5 8.4,60.8 23.75,61.25 25.25,61.25 12.4,61.5 40.5,61.5 42,61.5 67.25,61.5 34.25,62.25 29,62.5 69,63 71.75,63 75.25,63 78.5,63 48.25,63.25 40.1,64 39.5,64.7 14.5,65.4 24.25,65.75 34.25,66.5 19.75,66.75 22.6,67.2 3.3,67.3 6.1,67.4 4.7,67.6 31.5,68.25 16.3,68.4 21,68.5 28.5,68.5 2.5,68.7 34.25,69 19.8,69.1 11.25,69.25 61,69.5 5,69.6 24.75,69.75 22.5,70 2.2,70.1 61.5,70.5 20,70.75 5.8,71.8 10.3,71.8 12.75,72 53,72 22,72.25 24.75,72.5 48,73 52.25,73 55.5,73 14.5,74 22.8,74.1 29.25,75.25 31.5,75.25 24.25,75.5 35.25,76 30.5,76.25 11.75,76.75 52.75,76.75 24.8,76.9 29.5,77.25 31.5,77.25 35.25,77.25 47.75,77.25 41.2,77.4 42.4,77.4 62,78 11.2,78.2 4.4,78.3 6.7,78.3 8.6,78.3 62,79.25 19.4,79.5 22,80.25 62,80.75 15.5,80.9 18.1,81 14,82.75 56.25,82.75 17.5,83.25 23.5,83.5 57.25,83.5 15.5,83.7 56.25,84.25 7,85 30.6,84.998 57.25,85 22.5,85.75 31.8,85.8 57.6,87.1 57.6,88.2 55,88.4 52.25,88.5 68.25,88.5 51.25,88.75 29.3,88.8 46.7,89 48.1,89 6.75,89.25 62.5,90.5 61.5,91.5 63.25,91.5 35.75,91.75 38.75,91.75 41.5,91.75 43.25,91.75 51.5,91.75 54,91.75 56.75,91.75 59,91.75 47.5,92 7,92.25 30.25,93 33,93 31.75,94 30,94.25 66.25,94.25 38,94.75 41,94.75 43.25,94.75 47.25,94.75 52,94.75 54.5,94.75 56.25,94.75 58.25,94.75 60.75,94.75 63.25,94.75 8.75,95 21.5,95 36.5,95.75 7.25,96 16.25,96.25 70.25,97 24.5,97.75 22.5,98 43.25,98 56,98 36,98.25 18.5,98.5 52.5,98.5 47.5,98.75 58.25,99 72,99 43.25,99.75 54.5,99.75 15,100 21.5,100 36.25,100.75 18.5,101 12,101.25 47.5,101.25 53.25,101.5 56.25,101.5 58.75,101.5 7.75,101.75 43.25,102.25 47.25,102.75 22.25,103 16.5,103.25 57.75,103.25 72.5,103.25 68.1,103.3 36.25,103.5 18.75,103.75 51.75,103.75 42.5,104 54.25,104 56.25,104 22,104.75 68.1,105.4 47,105.5 52,105.5 39.25,105.75 42.75,106 5.75,106.25 36.25,106.25 41.5,106.5 54.25,106.5 57.5,106.5 59.75,106.5 11.75,106.75 63,106.75 38.75,107.5 51.5,107.75 21.25,108 40.75,108.25 47.5,108.25 32.75,108.5 58.25,108.75 6,109 52.5,109 11,109.25 38.25,109.25 47.5,109.9 40.75,110 55,110 22.5,110.25 31.75,110.75 53.75,111 59.25,111 52,111.25 12.25,111.5 25,111.5 6,112.25 37.75,112.5 23.5,113.5 31.25,113.5 32.75,113.5 6,114 8,114 21,114 25,114.25 10.5,114.5 12,114.5 73,114.5 53.264,114.531 76.124,114.557 77.775,114.658 48.75,115.75 49.86,115.801 54.762,115.878 61.417,116.005 70.75,116.25 66.25,116.5 76.276,116.843 57.25,117 31,117.75 63,118 55,118.25 18,118.5 68.75,118.5 40.75,118.75 59.75,118.75 33.25,119 12,119.25 23.75,119.25 38.25,119.25 65.786,119.332 35.25,119.5 48.362,119.865 24.75,120 40.25,120 3,120.25 26.25,120.25 37.5,120.75 76.302,120.983 18.25,121 71,121 48.362,121.135 4.75,121.25 35.25,121.5 65.5,121.75 60,122 26,122.25 27.5,122.25 55,122.25 48.387,122.304 29.75,123 24,123.5 62.636,123.675 10.5,124 58.318,124.006 69.25,124 17.75,124.25 3.75,124.75 28,124.75 30.25,125 78.156,125.555 31.75,125.75 64.5,126 8.25,126.25 19.25,126.25 71.5,126.25 56.25,126.5 3.25,126.75 43.5,126.75 52.426,127.054 12.5,127.25 32.25,127.25 30.75,127.5 72.492,127.511 10.25,127.75 60,127.75 28.25,128 48.5,128 68,128 21.75,128.5 23.25,128.5 18.5,128.75 32.5,128.75 43.25,128.75 53.5,128.75 70.637,129.289 63.475,129.543 18,130.25 56.261,130.559 48.5,131 58.649,132.108 52.603,132.21 61.951,132.261 65.735,132.362 68.936,132.362 71.526,132.388 53.518,133.607 18.5,134.25 55.067,134.623 52.603,134.953 19.5,135.25 78.461,135.258 18.15,135.75 51.46,135.918 75.311,136.579 76.276,136.604 48.971,136.629 36.2,136.9 18.5,137.75 44.75,138.25 68.682,138.661 73.101,138.661 19.5,138.75 48.793,139.22 18.75,140 53.162,140.16 74.549,140.262 2.75,141 33.75,141 35.25,141.75 10.5,142 8.25,142.25 42,142.25 58,142.25 52.908,142.903 12.25,143 31.75,143 55.55,143.005 29.25,143.25 4,143.5 13.5,143.5 6.25,143.75 22.25,143.75 26.25,143.75 43.25,144 33.5,144.25 24.25,144.75 27.5,144.75 30.5,144.75 20.75,145 55.905,145.037 52.705,145.113 78.003,145.469 43.75,145.75 76.378,145.926 32.75,146 3.5,146.75 54,146.764 64.5,147 59,147.25 40.75,147.5 43.5,147.5 57.25,147.5 34.25,148 18.75,148.25 21,148.25 26.5,148.25 32.25,148.25 8.75,149.25 12,149.25 54.077,149.66 61.75,150 13.75,150.5 8.5,151.5 11.5,152.5 15.25,152.75 23.25,152.75 18.75,153 27,153 30.25,153 34.75,153 38.5,153 41.5,153.25
JTCK: J3.9 R4.1 U5.76 | length 45.9
  Top Layer w0.254: U5.76@50.704,71.002 v1@50.704,73.2
  Top Layer w0.5: J3.9@29.324,83.728 29.324,85.156 R4.1@31.496,87.328
  Bottom Layer w0.254: J3.9@29.324,83.728 29.324,87.315 29.972,87.963 47.244,87.963 49.327,87.963 50.704,86.586 v1@50.704,73.2
  other v1: 50.7,73.2
JTDI: J3.5 R2.2 U5.77 | length 34.7
  Top Layer w0.254: U5.77@50.204,71.002 v1(50.204,72.356)
  Bottom Layer w0.254: J3.5@34.404,83.728 34.404,86.464 35.395,87.455 46.482,87.455 49.086,87.455 50.204,86.337 v1(50.204,72.356)
JTDO: J3.6 R14.2 U5.89 | length 19.9
  Top Layer w0.254: J3.6@34.404,81.188 33.909,80.693 R14.2@33.909,78.692 33.909,74.679 34.544,74.044 43.434,74.044 44.204,73.274 U5.89@44.204,71.002
JTMS: J3.7 R3.2 U5.72 | length 41.5
  Top Layer w0.254: v1(35.382,74.628) v1(46.38,74.628) ; v1(50.419,66.424) 50.419,67.414 50.957,67.952 U5.72@52.254,67.952
  Top Layer w0.5: J3.7@31.864,83.728 33.528,85.392 R3.2@33.528,87.201
  Bottom Layer w0.254: J3.7@31.864,83.728 33.122,82.47 33.122,75.085 33.579,74.628 v1(35.382,74.628) ; v1(46.38,74.628) 46.38,67.465 47.422,66.424 v1(50.419,66.424)
JTRST: J3.3 R1.2 U5.90 | length 22.8
  Top Layer w0.254: v1(43.5,72.4) 43.704,72.196 U5.90@43.704,71.002
  Top Layer w0.5: J3.3@36.944,83.728 37.592,84.376 R1.2@37.592,87.252
  Bottom Layer w0.254: J3.3@36.944,83.728 38.195,82.477 43.223,82.477 44.1,81.6 44.1,73 v1(43.5,72.4)
LED1: LED1.2 U5.60 | length 5
  Top Layer w0.254: U5.60@52.254,61.952 55.19,61.952 LED1.2@56.642,60.5
LED2: LED2.2 U5.61 | length 4.7
  Top Layer w0.254: U5.61@52.254,62.452 54.55,62.452 55.398,63.3 LED2.2@56.642,63.3
LED3: LED3.2 U5.62 | length 6.9
  Top Layer w0.254: U5.62@52.254,62.952 54.415,62.952 55.22,63.757 55.22,65.744 55.575,66.1 LED3.2@56.642,66.1
LED4: LED4.2 U5.63 | length 9.4
  Top Layer w0.254: U5.63@52.254,63.452 54.178,63.452 54.712,63.985 54.712,68.608 54.975,68.872 LED4.2@56.699,68.872